# EAGLE board mixer (EAGLE 7.1.0)
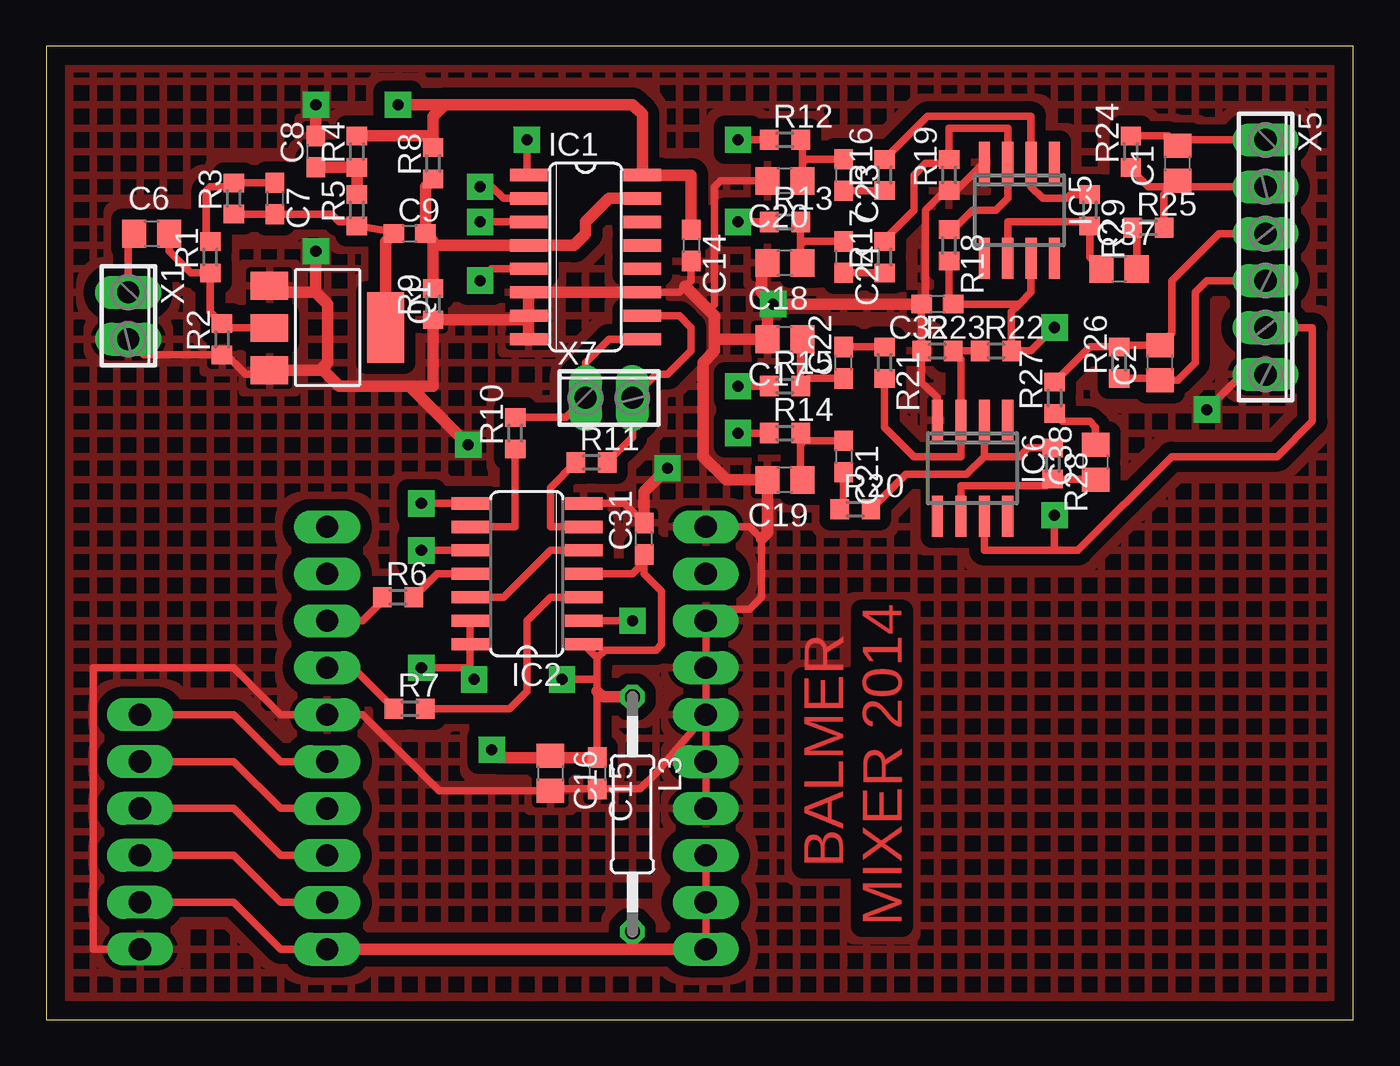
[diagram p0: board, top side]
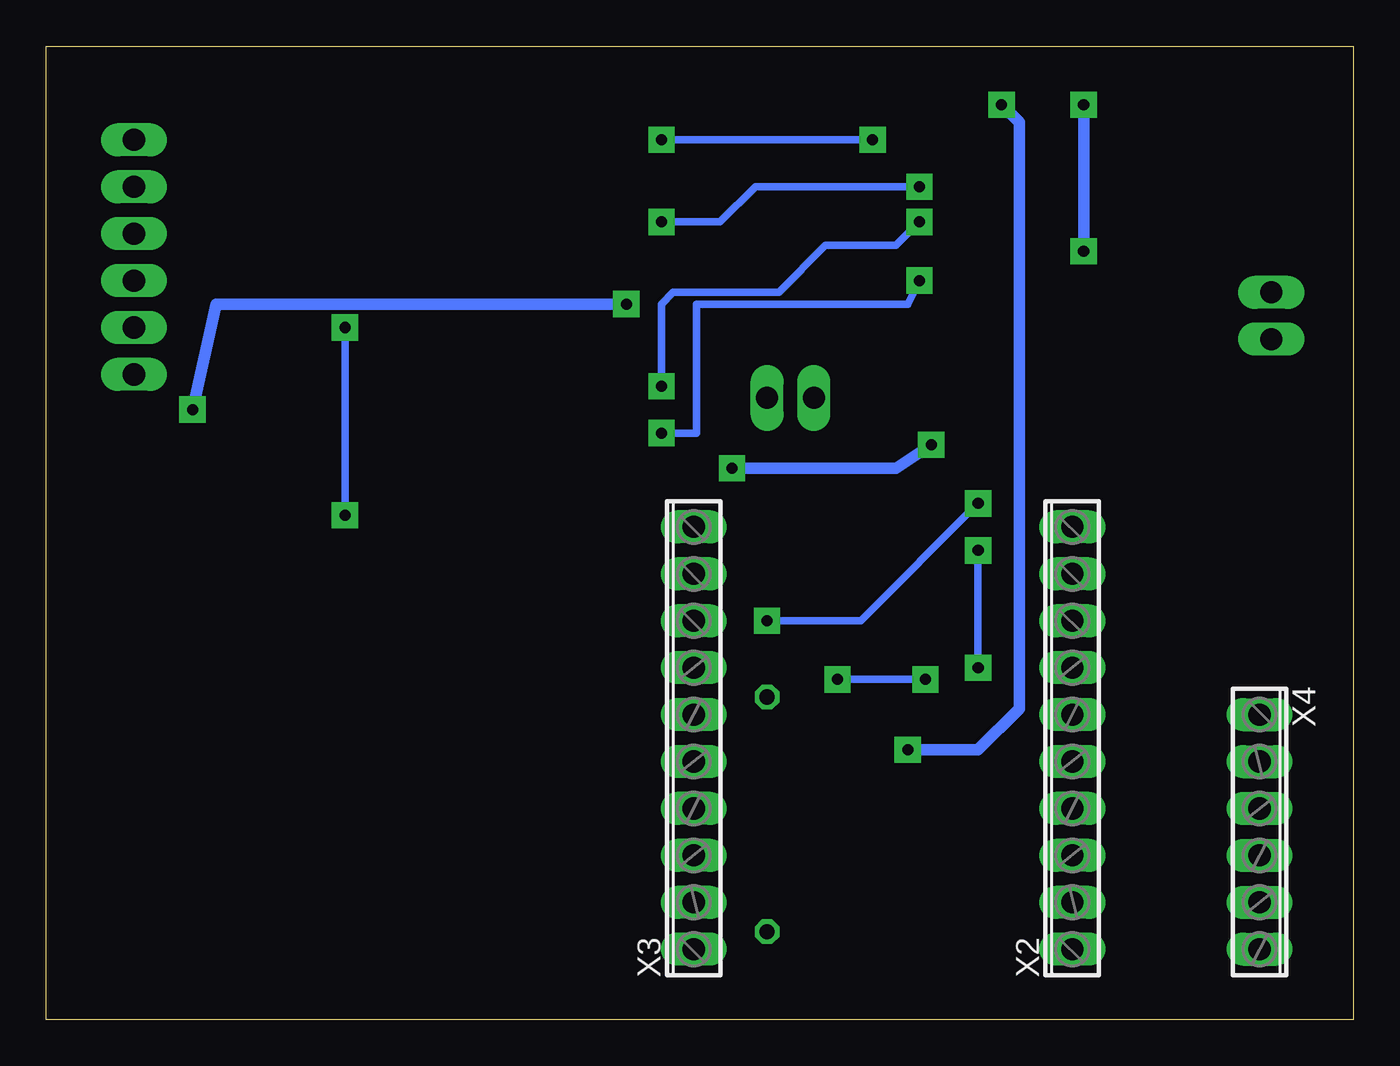
[diagram p1: board, bottom side, seen from below]

Size 70.79 x 52.7 mm. Coordinates in mm from the lower left corner, seen from the top.
Outline: 0,0 70.79,0 70.79,52.7 0,52.7 0,0
Copper layers (1*16): Top 0.035mm / dielectric 1.5mm / Bottom 0.035mm
Design rules "default": minimum track width 10mil, minimum drill 24mil, track to track 8mil, track to pad 8mil, pad to pad 8mil, via to via 8mil, smd to smd 8mil, copper to edge 40mil, drill to drill 8mil, minimum pad ring 10mil, minimum via ring 8mil, stop-mask expansion 4mil, vias tented up to drill 0mil, thermal gap 10mil

## Footprints (pad centres in the part's own frame; a part is rotated, then mirrored left to right if it is on the bottom)
C0805 = smd 1.3 x 1.5: 1 -0.95,0; 2 0.95,0
C0603 = smd 1.1 x 1: 1 -0.85,0; 2 0.85,0
SO16 = smd 0.66 x 2.032: 1 -4.445,-3.073; 2 -3.175,-3.073; 3 -1.905,-3.073; 4 -0.635,-3.073; 5 0.635,-3.073; 6 1.905,-3.073; 7 3.175,-3.073; 8 4.445,-3.073; 9 4.445,3.073; 10 3.175,3.073; 11 1.905,3.073; 12 0.635,3.073; 13 -0.635,3.073; 14 -1.905,3.073; 15 -3.175,3.073; 16 -4.445,3.073
SO14 = smd 0.66 x 2.032: 1 -3.81,-3.073; 2 -2.54,-3.073; 3 -1.27,-3.073; 4 0,-3.073; 5 1.27,-3.073; 6 2.54,-3.073; 7 3.81,-3.073; 8 3.81,3.073; 9 2.54,3.073; 10 1.27,3.073; 11 0,3.073; 12 -1.27,3.073; 13 -2.54,3.073; 14 -3.81,3.073
SO08 = smd 0.6 x 2.2: 1 -1.905,-2.6; 2 -0.635,-2.6; 3 0.635,-2.6; 4 1.905,-2.6; 5 1.905,2.6; 6 0.635,2.6; 7 -0.635,2.6; 8 -1.905,2.6
0207/12 = drill 0.813 octagon: 1 -6.35,0; 2 6.35,0
SOT223 = smd 1.499 x 2.007: 1 -2.261,-3.15; 2 0.025,-3.15; 3 2.311,-3.15 | smd 3.81 x 2.007: 4 0,3.15
R0603 = smd 1 x 1.1: 1 -0.85,0; 2 0.85,0
2POL254 = drill 1.2 long: 1 -1.27,0; 2 1.27,0
10POL254 = drill 1.2 long: 1 -11.43,0; 2 -8.89,0; 3 -6.35,0; 4 -3.81,0; 5 -1.27,0; 6 1.27,0; 7 3.81,0; 8 6.35,0; 9 8.89,0; 10 11.43,0
6POL254 = drill 1.2 pad 1.778 long: 1 -6.35,0; 2 -3.81,0; 3 -1.27,0; 4 1.27,0; 5 3.81,0; 6 6.35,0

## Placement (x,y rotation side)
C1  680  [C0805]  61.28,46.35 90 top
C2  680  [C0805]  60.33,35.56 90 top
C6  33n  [C0805]  5.71,42.55 0 top
C7  100n  [C0603]  12.38,44.45 270 top
C8  100n  [C0603]  14.61,46.99 90 top
C9  100n  [C0603]  19.68,42.55 0 top
C14  100n  [C0603]  34.92,41.91 270 top
C15  1mk  [C0603]  29.84,13.34 270 top
C16  10mk  [C0805]  27.3,13.34 270 top
C17  3300  [C0805]  40.01,36.83 180 top
C18  3300  [C0805]  40.01,40.96 180 top
C19  3300  [C0805]  40.01,29.21 180 top
C20  3300  [C0805]  40.01,45.4 180 top
C21  1mk  [C0603]  43.18,30.48 270 top
C22  1mk  [C0603]  43.18,35.56 90 top
C23  1mk  [C0603]  43.18,45.72 270 top
C24  1mk  [C0603]  43.18,41.27 270 top
C31  100n  [C0603]  32.38,26.04 90 top
C32  1mk  [C0603]  48.26,38.73 180 top
C37  10mk  [C0805]  58.1,40.64 0 top
C38  10mk  [C0805]  56.83,30.16 90 top
IC1  74AC4053D  [SO16]  29.21,41.27 270 top
IC2  74AC74D  [SO14]  26.04,24.13 90 top
IC5  NE5534D  [SO08]  52.7,43.81 180 top
IC6  NE5534D  [SO08]  50.16,29.84 180 top
L3  100uH  [0207/12]  31.75,11.11 270 top
Q1  BFG135  [SOT223]  15.24,37.47 270 top
R1  330  [R0603]  8.89,41.27 90 top
R2  1K5  [R0603]  9.53,36.83 90 top
R3  3.3K  [R0603]  10.16,44.45 90 top
R4  33  [R0603]  16.83,46.99 90 top
R5  33  [R0603]  16.83,43.81 90 top
R6  22  [R0603]  19.05,22.86 0 top
R7  22  [R0603]  19.68,16.83 0 top
R8  1K5  [R0603]  20.95,46.35 90 top
R9  1K5  [R0603]  20.95,38.73 90 top
R10  10  [R0603]  25.4,31.75 90 top
R11  10  [R0603]  29.53,30.16 0 top
R12  33  [R0603]  40.01,47.62 0 top
R13  33  [R0603]  40.01,43.18 0 top
R14  33  [R0603]  40.01,31.75 0 top
R15  33  [R0603]  40.01,34.29 0 top
R16  1K  [R0603]  45.4,45.72 90 top
R17  1K  [R0603]  45.4,41.27 90 top
R18  68K  [R0603]  48.9,41.91 270 top
R19  68K  [R0603]  48.9,45.72 90 top
R20  1K  [R0603]  43.81,27.62 0 top
R21  1K  [R0603]  45.4,35.56 270 top
R22  68K  [R0603]  51.44,36.2 0 top
R23  68K  [R0603]  48.26,36.2 0 top
R24  12k  [R0603]  58.74,46.99 90 top
R25  100  [R0603]  59.69,42.86 0 top
R26  12k  [R0603]  58.1,35.56 90 top
R27  100  [R0603]  54.61,33.66 90 top
R28  10K  [R0603]  54.51,30.1 270 top
R29  10K  [R0603]  56.52,43.81 270 top
X1  [2POL254]  4.45,38.1 270 top
X2  [10POL254]  15.22,15.24 90 bottom
X3  [10POL254]  35.72,15.24 90 bottom
X4  [6POL254]  5.08,10.16 270 bottom
X5  [6POL254]  66.04,41.27 270 top
X7  [2POL254]  30.48,33.66 0 top

## Library data of the parts
C1 C2 C6-C9 C14-C24 C31 C32 C37 C38 L3 R1-R29 = rcl
IC1 = 40xx
IC2 = 74xx-eu
IC5 IC6 = linear
Q1 = balmer
X1-X5 X7 = con-phoenix-254; OC_FARNELL: unknown; OC_NEWARK: unknown

## Nets
+5V: C14.1 C15.1 C16.1 C31.1 IC1.16 IC2.1 IC2.4 IC2.10 IC2.13 IC2.14 L3.1 R4.2 R8.2
A_RESET: X2.5 X4.1
AD7: X2.4 X4.2
FQ_UD: X2.3 X4.3
GND: C8.2 C14.2 C15.2 C16.2 C17.2 C18.2 C19.2 C20.2 C31.2 C32.2 IC1.6 IC1.7 IC1.8 IC1.11 IC2.7 IC5.4 IC6.4 Q1.1 Q1.3 R2.1 R9.1 R19.1 R23.1 X1.2 X2.6 X3.4 X3.5 X3.6 X3.7 X3.8 X3.10 X4.6 X5.6
I-LO: IC1.9 R10.2 X7.1
J_OUT: X2.9
N$1: IC2.5 IC2.12
N$2: IC2.2 IC2.8
N$3: IC2.11 R6.2
N$4: IC2.3 R7.2
N$5: IC1.3 R15.1
N$6: C9.2 IC1.4 IC1.15 R8.1 R9.2
N$7: C7.1 R1.2 R3.2
N$8: IC1.5 R14.1
N$9: IC1.2 R13.1
N$10: IC1.1 R12.1
N$11: C17.1 C22.1 R15.2
N$12: C19.1 C21.1 R14.2
N$13: C18.1 C24.1 R13.2
N$14: C20.1 C23.1 R12.2
N$15: IC5.3 R17.2 R18.1 R19.2
N$16: C38.1 IC6.6 R28.2
N$17: IC5.2 R16.2 R29.1
N$18: C37.1 IC5.6 R29.2
N$19: C23.2 R16.1
N$20: C21.2 R20.1
N$21: C22.2 R21.1
N$22: IC6.2 R20.2 R28.1
N$23: IC6.3 R21.2 R22.1 R23.2
N$24: C6.1 X1.1
N$25: C24.2 R17.1
N$26: C37.2 R25.1
N$27: C1.1 R24.1 R25.2 X5.2
N$28: C1.2 R24.2 X5.1
N$29: C2.1 R26.1 X5.4
N$30: C2.2 R26.2 R27.2 X5.3
N$31: IC2.9 R10.1
N$32: IC2.6 R11.1
N$33: C38.2 R27.1
N$34: C7.2 C9.1 Q1.4 R3.1 R5.1
N$36: X3.9
N$37: C8.1 R4.1 R5.2
N$44: C6.2 Q1.2 R1.1 R2.2
Q-LO: IC1.10 R11.2 X7.2
QOUT: R7.1 X2.7
QOUTB: R6.1 X2.8
VCC: L3.2 X2.1 X3.1 X3.2 X3.3 X4.5
VDD: C32.1 IC5.7 IC6.7 R18.2 R22.2 X5.5
W_CLK: X2.2 X4.4
Z_OUT: X2.10

## Tracks (layer width: path | path; a pad name or v marks a point on that pad's centre or on a via)
+5V  (via drill 0.6 pad 1.42)
  Top 0.406: 27.41,14.19 C16.1 | C15.1 29.84,17.78 29.84,18.41 | 29.84,18.41 29.84,19.05 29.84,19.58 | 29.84,19.58 IC2.1 | IC2.13 IC2.14 22.96,19.05 | IC2.4 31.75,24.13 32.38,24.77 C31.1 32.38,24.13 33.34,23.18 33.34,20.32 33.02,20 30.26,20 29.84,19.58 | 22.96,19.05 22.96,18.63 v23.18,18.41 | v27.94,18.41 29.84,18.41 | IC2.10 v20.32,25.4 | v20.32,19.05 22.96,19.05
  Top 0.61: C14.1 34.92,45.72 IC1.16 32.28,49 31.75,49.53 21.59,49.53 | 21.59,49.53 20.95,48.9 20.95,47.62 | 20.95,47.62 R8.2 20.95,47.62 | R4.2 20.74,47.84 20.95,47.62 | 23.81,14.29 v24.13,14.61 24.55,14.19 27.41,14.19 | v19.05,49.53 21.59,49.53 | C15.1 27.41,14.19 | 27.41,14.19 C16.1 | L3.1 30.16,17.46 29.84,17.78
  Bottom 0.406: v23.18,18.41 v27.94,18.41 | v20.32,25.4 v20.32,19.05
  Bottom 0.61: v24.13,14.61 20.32,14.61 18.1,16.83 18.1,48.58 v19.05,49.53
A_RESET
  Top 0.406: X2.5 12.7,13.97 10.16,16.51 X4.1
AD7
  Top 0.406: X2.4 12.7,11.43 10.16,13.97 X4.2
FQ_UD
  Top 0.406: X2.3 12.7,8.89 10.16,11.43 X4.3
GND  (via drill 0.6 pad 1.42)
  Top 0.406: IC1.11 34.29,39.37 34.61,39.69 34.92,40.01 C14.2 | Q1.3 11.86,34.92 10.79,34.92 9.74,35.98 R2.1 5.29,35.98 X1.2 | X4.6 2.54,3.81 2.54,19.05 10.16,19.05 12.7,16.51 X2.6 17.14,16.51 20.95,12.7 21.27,12.38 C16.2 27.41,12.48 C15.2 32.17,12.48 33.02,13.34 X3.6 | IC2.7 31.33,27.94 C31.2 | X3.10 38.1,26.67 38.73,26.04 38.73,22.86 38.1,22.23 36.35,22.23 X3.8 X3.7 X3.6 | X3.6 X3.5 X3.4 | 38.74,40.64 C18.2 | C20.2 36.51,45.4 36.2,45.09 36.2,38.73 35.88,38.42 | IC6.4 48.26,33.66 47.41,34.51 R23.1 C32.2 47.62,38.95 47.62,43.81 48.68,44.87 R19.1 49.26,44.87 IC5.4 | X5.6 64.77,34.92 v62.87,33.02
  Top 0.61: Q1.3 14.83,35.15 14.92,35.24 | 14.92,35.24 15.24,35.56 15.24,38.73 14.92,39.05 | 14.92,39.05 14.61,39.37 | 14.61,39.37 12.45,39.37 Q1.1 | 19.68,34.29 20.95,34.29 R9.1 25.92,37.88 IC1.7 | 19.68,34.29 15.88,34.29 14.92,35.24 | IC1.7 IC1.6 IC1.11 | IC1.8 IC1.7 | v22.86,31.11 19.68,34.29 | C8.2 v14.61,49.53 | v14.61,41.59 14.61,39.37 | 14.61,39.37 14.92,39.05 | 36.2,36.83 36.2,36.2 35.56,35.56 35.56,30.48 36.83,29.21 C19.2 39.05,26.36 38.73,26.04 | 36.2,36.83 C17.2 39.05,38.42 v39.37,38.73 | C32.2 v39.37,38.73 | 38.74,40.64 38.74,39.37 v39.37,38.73 | 36.2,36.83 36.2,38.1 35.88,38.42 34.61,39.69 | C31.2 32.38,28.57 v33.66,29.84
  Bottom 0.61: v33.66,29.84 24.77,29.84 v22.86,31.11 | v14.61,49.53 v14.61,41.59 | v39.37,38.73 61.59,38.73 v62.87,33.02
  pour Top (isolate 0.61, hatched): 0,52.7 70.48,52.7 70.48,0 0,0
I-LO
  Top 0.406: R10.2 28.16,32.6 X7.1 29.21,35.56 30.48,36.83 IC1.9
N$1
  Top 0.406: IC2.12 24.77,22.86 27.3,25.4 IC2.5
N$2  (via drill 0.6 pad 1.42)
  Top 0.406: IC2.2 v31.75,21.59 | v20.32,27.94 IC2.8
  Bottom 0.406: v31.75,21.59 26.67,21.59 v20.32,27.94
N$3
  Top 0.406: IC2.11 21.17,24.13 R6.2
N$4
  Top 0.406: IC2.3 27.3,22.86 26.04,21.59 26.04,19.05 26.04,17.78 25.08,16.83 R7.2
N$5  (via drill 0.6 pad 1.42)
  Top 0.406: R15.1 v37.47,34.29 | IC1.3 v23.5,43.18
  Bottom 0.406: v23.5,43.18 24.77,41.91 28.57,41.91 31.11,39.37 36.2,39.37 36.83,39.37 37.47,38.73 v37.47,34.29
N$6
  Top 0.61: 20.95,41.91 IC1.4 28.57,41.91 29.21,42.55 29.21,43.18 30.48,44.45 IC1.15 | R8.1 20.54,45.09 C9.2 20.95,42.12 20.95,41.91 | R9.2 20.95,41.91
N$7
  Top 0.406: R1.2 8.68,42.34 8.68,44.87 8.89,45.09 9.95,45.09 R3.2 C7.1
N$8  (via drill 0.6 pad 1.42)
  Top 0.406: IC1.5 24.13,40.64 v23.5,40.01 | R14.1 v37.47,31.75
  Bottom 0.406: v23.5,40.01 24.13,38.73 35.56,38.73 35.56,31.75 v37.47,31.75
N$9  (via drill 0.6 pad 1.42)
  Top 0.406: R13.1 v37.47,43.18 | v23.5,45.09 24.13,45.09 24.77,44.45 IC1.2
  Bottom 0.406: v37.47,43.18 34.29,43.18 32.38,45.09 v23.5,45.09
N$10  (via drill 0.6 pad 1.42)
  Top 0.406: R12.1 v37.47,47.62 | v26.04,47.62 26.04,45.82 IC1.1
  Bottom 0.406: v37.47,47.62 v26.04,47.62
N$11
  Top 0.406: C17.1 40.85,36.73 R15.2 41.27,34.71 C22.1
N$12
  Top 0.406: R14.2 40.85,31.11 | 40.85,31.11 40.85,29.31 C19.1 | C21.1 41.07,31.33 40.85,31.11
N$13
  Top 0.406: R13.2 40.85,41.91 | 40.85,41.91 40.85,41.06 C18.1 | C24.1 41.07,42.12 40.85,41.91
N$14
  Top 0.406: C20.1 40.95,46.35 | 40.95,46.35 40.95,47.52 R12.2 | C23.1 41.17,46.57 40.95,46.35
N$15
  Top 0.406: R18.1 49.11,42.76 50.16,43.81 51.44,43.81 52.07,44.45 IC5.3 52.07,48.26 48.9,48.26 48.9,47.62 R19.2 48.68,46.35 47.62,46.35 46.99,45.72 46.99,43.81 45.4,42.23 R17.2
N$16
  Top 0.406: IC6.6 49.53,28.89 54.15,28.89 R28.2 56.79,29.25 C38.1
N$17
  Top 0.406: R29.1 55.46,44.66 55.24,44.45 53.98,44.45 53.34,45.09 IC5.2 53.34,48.9 47.73,48.9 R16.2
N$18
  Top 0.406: IC5.6 52.07,43.18 56.3,43.18 R29.2 56.52,41.28 C37.1
N$19
  Top 0.406: C23.2 R16.1
N$20
  Top 0.406: C21.2 43.18,27.84 R20.1
N$21
  Top 0.406: C22.2 R21.1
N$22
  Top 0.406: 50.8,30.48 IC6.2 | R28.1 53.18,30.95 52.7,30.48 50.8,30.48 | 50.8,30.48 49.85,29.53 47.31,29.53 46.57,29.53 R20.2
N$23
  Top 0.406: R21.2 45.4,32.07 46.99,30.48 49.53,30.48 IC6.3 49.53,35.77 R23.2 R22.1
N$24
  Top 0.406: X1.1 4.45,42.12 C6.1
N$25
  Top 0.406: C24.2 R17.1
N$26
  Top 0.406: C37.2 59.05,42.65 R25.1
N$27
  Top 0.406: R24.1 58.74,46.04 59.69,45.09 60.96,45.09 C1.1 | R25.2 60.54,44.67 C1.1 | X5.2 61.6,45.09 C1.1
N$28
  Top 0.406: R24.2 60.74,47.84 C1.2 61.6,47.62 X5.1
N$29
  Top 0.406: X5.4 62.87,40.01 62.23,39.37 62.23,35.56 61.28,34.61 C2.1 60.23,34.71 R26.1
N$30
  Top 0.406: X5.3 63.5,42.55 60.96,40.01 60.96,37.15 C2.2 58.2,36.51 R26.2 56.52,36.41 R27.2
N$31
  Top 0.406: IC2.9 25.4,26.67 R10.1
N$32
  Top 0.406: IC2.6 27.3,26.67 27.3,28.79 R11.1
N$33
  Top 0.406: C38.2 56.83,32.07 56.52,32.38 55.03,32.38 R27.1
N$34
  Top 0.406: C9.1 18.73,42.65 R5.1 16.61,43.18 15.88,43.18 15.46,43.6 C7.2 R3.1
  Top 0.61: Q1.4 18.39,42.1 C9.1
N$37
  Top 0.61: R5.2 R4.1 C8.1
N$44
  Top 0.406: Q1.2 9.77,37.44 R2.2 8.89,38.31 R1.1 7.83,40.42 6.67,41.59 6.67,42.44 C6.2
Q-LO
  Top 0.406: IC1.10 34.29,38.1 34.92,37.47 34.92,36.2 33.66,34.92 33.02,34.92 X7.2 31.75,31.54 R11.2
QOUT
  Top 0.406: X2.7 16.61,19.05 R7.1
QOUTB
  Top 0.406: R6.1 18.2,22.64 17.14,21.59 X2.8
VCC
  Top 0.406: X3.1 35.72,4.45 X3.2 X3.3 | X2.1 12.7,3.81 10.16,6.35 X4.5
  Top 0.61: X2.1 31.75,3.81 | 31.75,3.81 35.09,3.81 35.72,4.45 | L3.2 31.75,3.81
VDD  (via drill 0.6 pad 1.42)
  Top 0.406: 52.7,38.73 50.8,38.73 C32.1 48.9,38.95 R18.2 | 52.7,38.73 52.28,38.31 R22.2 53.34,36.2 v54.61,37.47 | IC6.7 50.8,25.4 54.61,25.4 | 54.61,25.4 55.88,25.4 60.96,30.48 66.67,30.48 68.58,32.38 68.58,37.47 X5.5 | IC5.7 53.34,39.37 52.7,38.73 | v54.61,27.3 54.61,25.4
  Bottom 0.406: v54.61,37.47 v54.61,27.3
W_CLK
  Top 0.406: X2.2 12.7,6.35 10.16,8.89 X4.4

## Text on the board
Top: BALMER | MIXER 2014